# Altium PCB 6P_JST-PH_EXT.PcbDoc
Units mm, origin at the board's own origin, x right, y up, seen from the top; angles counter-clockwise.
Board outline 17 x 25.3 mm, 2 copper layers (Top Layer, Bottom Layer), stack 1.569 mm thick; 2 components, 6 nets, 14 pads, 0 vias.
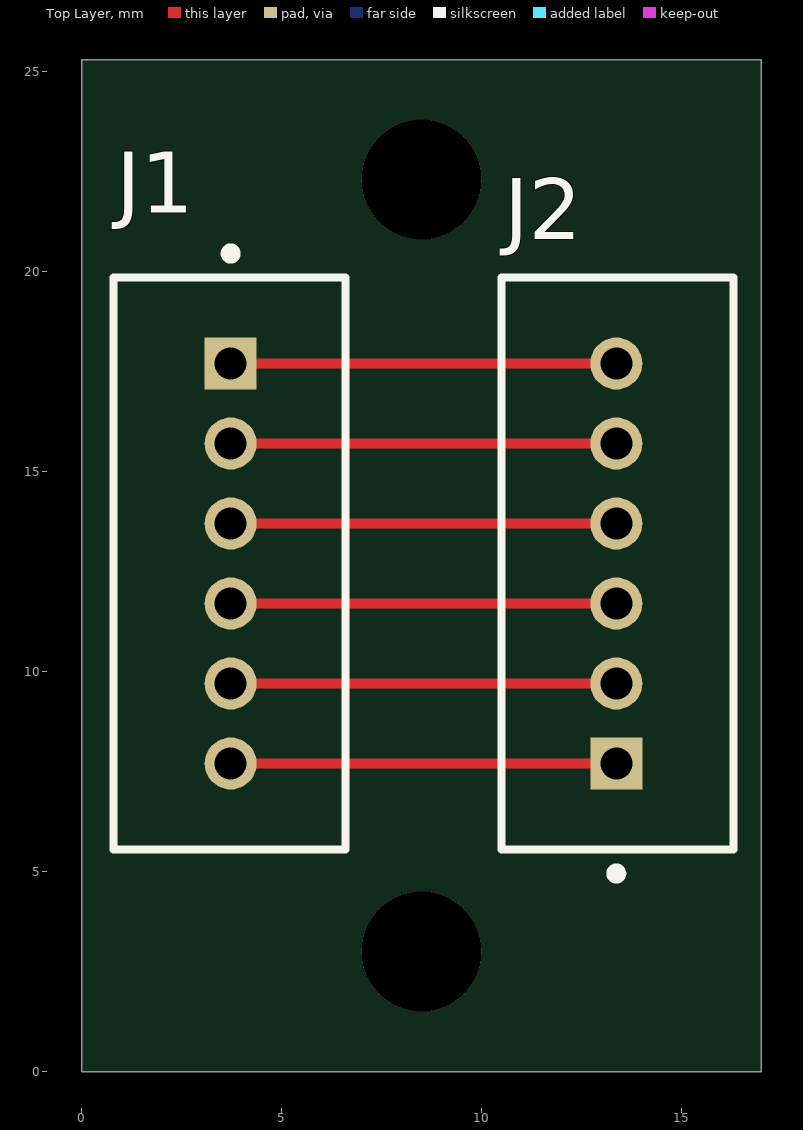
[diagram p0: Top Layer view]
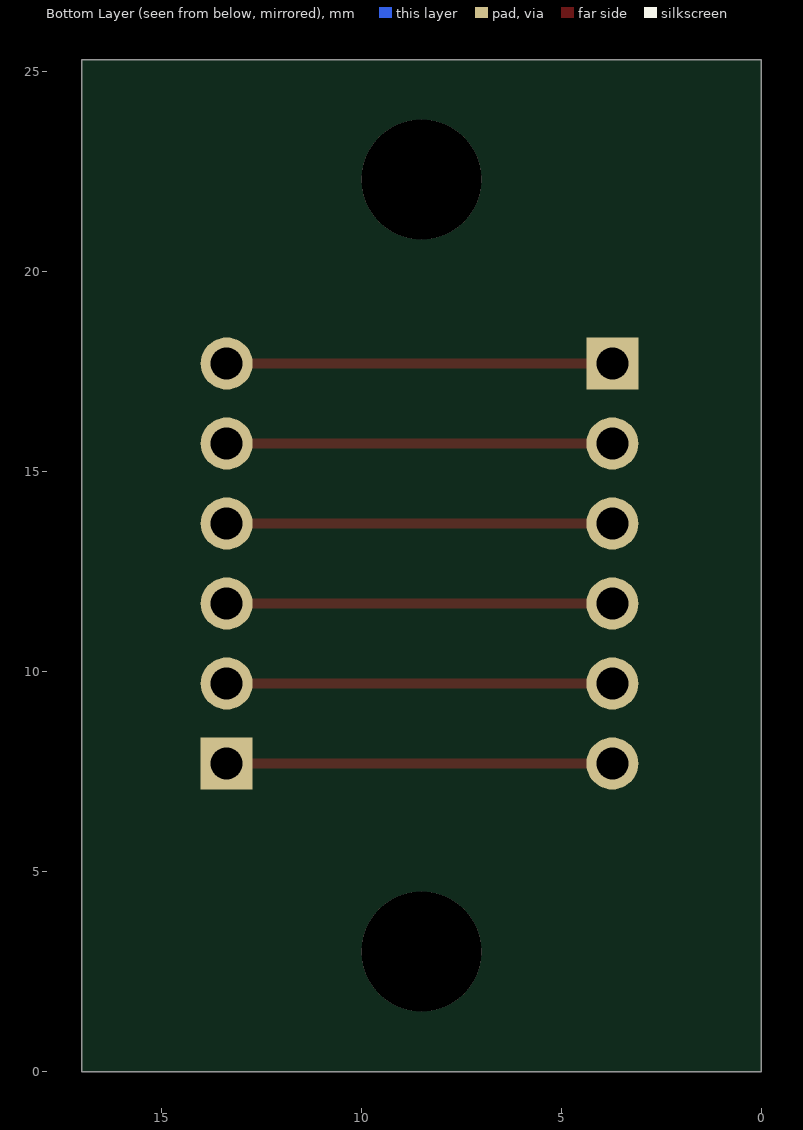
[diagram p1: Bottom Layer view, seen from below]

## Layer stack, top to bottom
Top Solder: solder mask 0.0254, SM-001, Dk 4
Top Layer: signal copper 0.035
Dielectric 1: core 1.4986, Core-043, Dk 4.3
Bottom Layer: signal copper 0.035
Bottom Solder: solder mask 0.0254, SM-001, Dk 4

## Board outline
0,0 17,0 17,25.3 0,25.3

## Design rules (kind name [scope] priority, off if disabled: settings)
Clearance [All] p1: gap=0.254 ignorepadtopadclearanceinfootprint=FALSE except(0: Arc-Hole Track-Hole SMDPad-Hole THPad-Hole Via-Hole Fill-Hole Poly-Hole Region-Hole Text-Hole)
PolygonConnect [All] p1: connectstyle=Relief reliefconductorwidth=0.254 reliefentries=4 polygonreliefangle="90 Angle" airgapwidth=0.254
RoutingVias [All] p1: holewidth=0.711 width=1.27 viastyle="Through Hole" minholewidth=0.711 minwidth=1.27 maxholewidth=0.711 maxwidth=1.27
SolderMaskExpansion [All] p1: expansion=0.102 istentingtop=FALSE
Width [All] p1: maxlimit=0.254 minlimit=0.254 preferedwidth=0.254
30 further rules are at their usual default settings.

## Components (designator, comment, footprint, x,y, rotation, side; value= is the part's Value field where it differs from the comment)
J1 "1735446-6" FP-1735446-6-MFG 3.7,12.7 r90 top
J2 "1735446-6" FP-1735446-6-MFG 13.4,12.7 r270 top

## Footprints (in the part's own frame and the unit in brackets; to place one, negate y for a bottom-side part, rotate by r counter-clockwise, add the part's x,y. Pads: shape width x height; smd on the part's side, far side on the other; paste and mask are expansions set on the pad)
FP-1735446-6-MFG [mm]
  rect 1.3x1.3 hole 0.8 paste-1000 mask+0: 1(5,-0.03)
  round 1.3 hole 0.8 paste-1000 mask+0: 2(3,-0.03) 3(1,-0.03) 4(-1,-0.03) 5(-3,-0.03) 6(-5,-0.03)
  silkscreen extent -7.15,-2.9 7.87,2.9, body extent -7.25,-3 7.25,3, height 0.25

## Part data
J1 J2: library part CMP-03369-000087-1, "CONN HEADER VERT 6POS 2MM", Current Rating=3A, Manufacturer=TE, Temperature="-25°C to +85°C", Temperature Range High=+85°C, Temperature Range Low=-25°C, Voltage Rating=100V, Automotive=No, Category=Conn, ComponentLink2Description=Datasheet, ComponentLink2URL=https://www.te.com/usa-en/product-1735446-6.html, Conn Gender=Male, Conn Orientation=Vertical, Contact Material=Tin,Nickel, Device Class L1=Connectors, Device Class L2="Headers and Wire Housings", Device Class L3=unset, Digikey Description="CONN HEADER VERT 6POS 2MM", Height=6.37mm, Lead Free=Yes, Manufacturer Part Number=1735446-6, Mouser Description="Headers & Wire Housings 6 POS HDR VERT 2.0mm", Number Of Contacts=6, Number Of Rows=1, Octopart=https://octopart.com/1735446-6-te+connectivity-42205942, Package=1735446-6, Pitch=2mm, RoHS=TRUE

## Free pads (board coordinates)
  round 3 hole 3 unplated: ""(8.5,3) ""(8.5,22.3)

## Nets (pads, with @x,y where several pads share a name; then routed paths per layer and width w, separated by ;. In a path a pad name is that pad's centre, name@x,y a point inside that pad or via, vN(x,y) a via of type N, cw(c..) or ccw(c..) an arc to the next point about the centre after c; other vN are vias at no path point)
NetJ1_1: J1.1 J2.6 | length 9.6
  Top Layer w0.254: J1.1 J2.6
NetJ1_2: J1.2 J2.5 | length 9.6
  Top Layer w0.254: J1.2 J2.5
NetJ1_3: J1.3 J2.4 | length 9.6
  Top Layer w0.254: J1.3 J2.4
NetJ1_4: J1.4 J2.3 | length 9.6
  Top Layer w0.254: J1.4 J2.3
NetJ1_5: J1.5 J2.2 | length 9.6
  Top Layer w0.254: J1.5 J2.2
NetJ1_6: J1.6 J2.1 | length 9.6
  Top Layer w0.254: J1.6 J2.1